# Altium PCB PCB2.PcbDoc
Units mm, origin at the board's own origin, x right, y up, seen from the top; angles counter-clockwise.
Board outline 55 x 70 mm, 2 copper layers (Top Layer, Bottom Layer); 75 components, 53 nets, 231 pads, 14 vias.
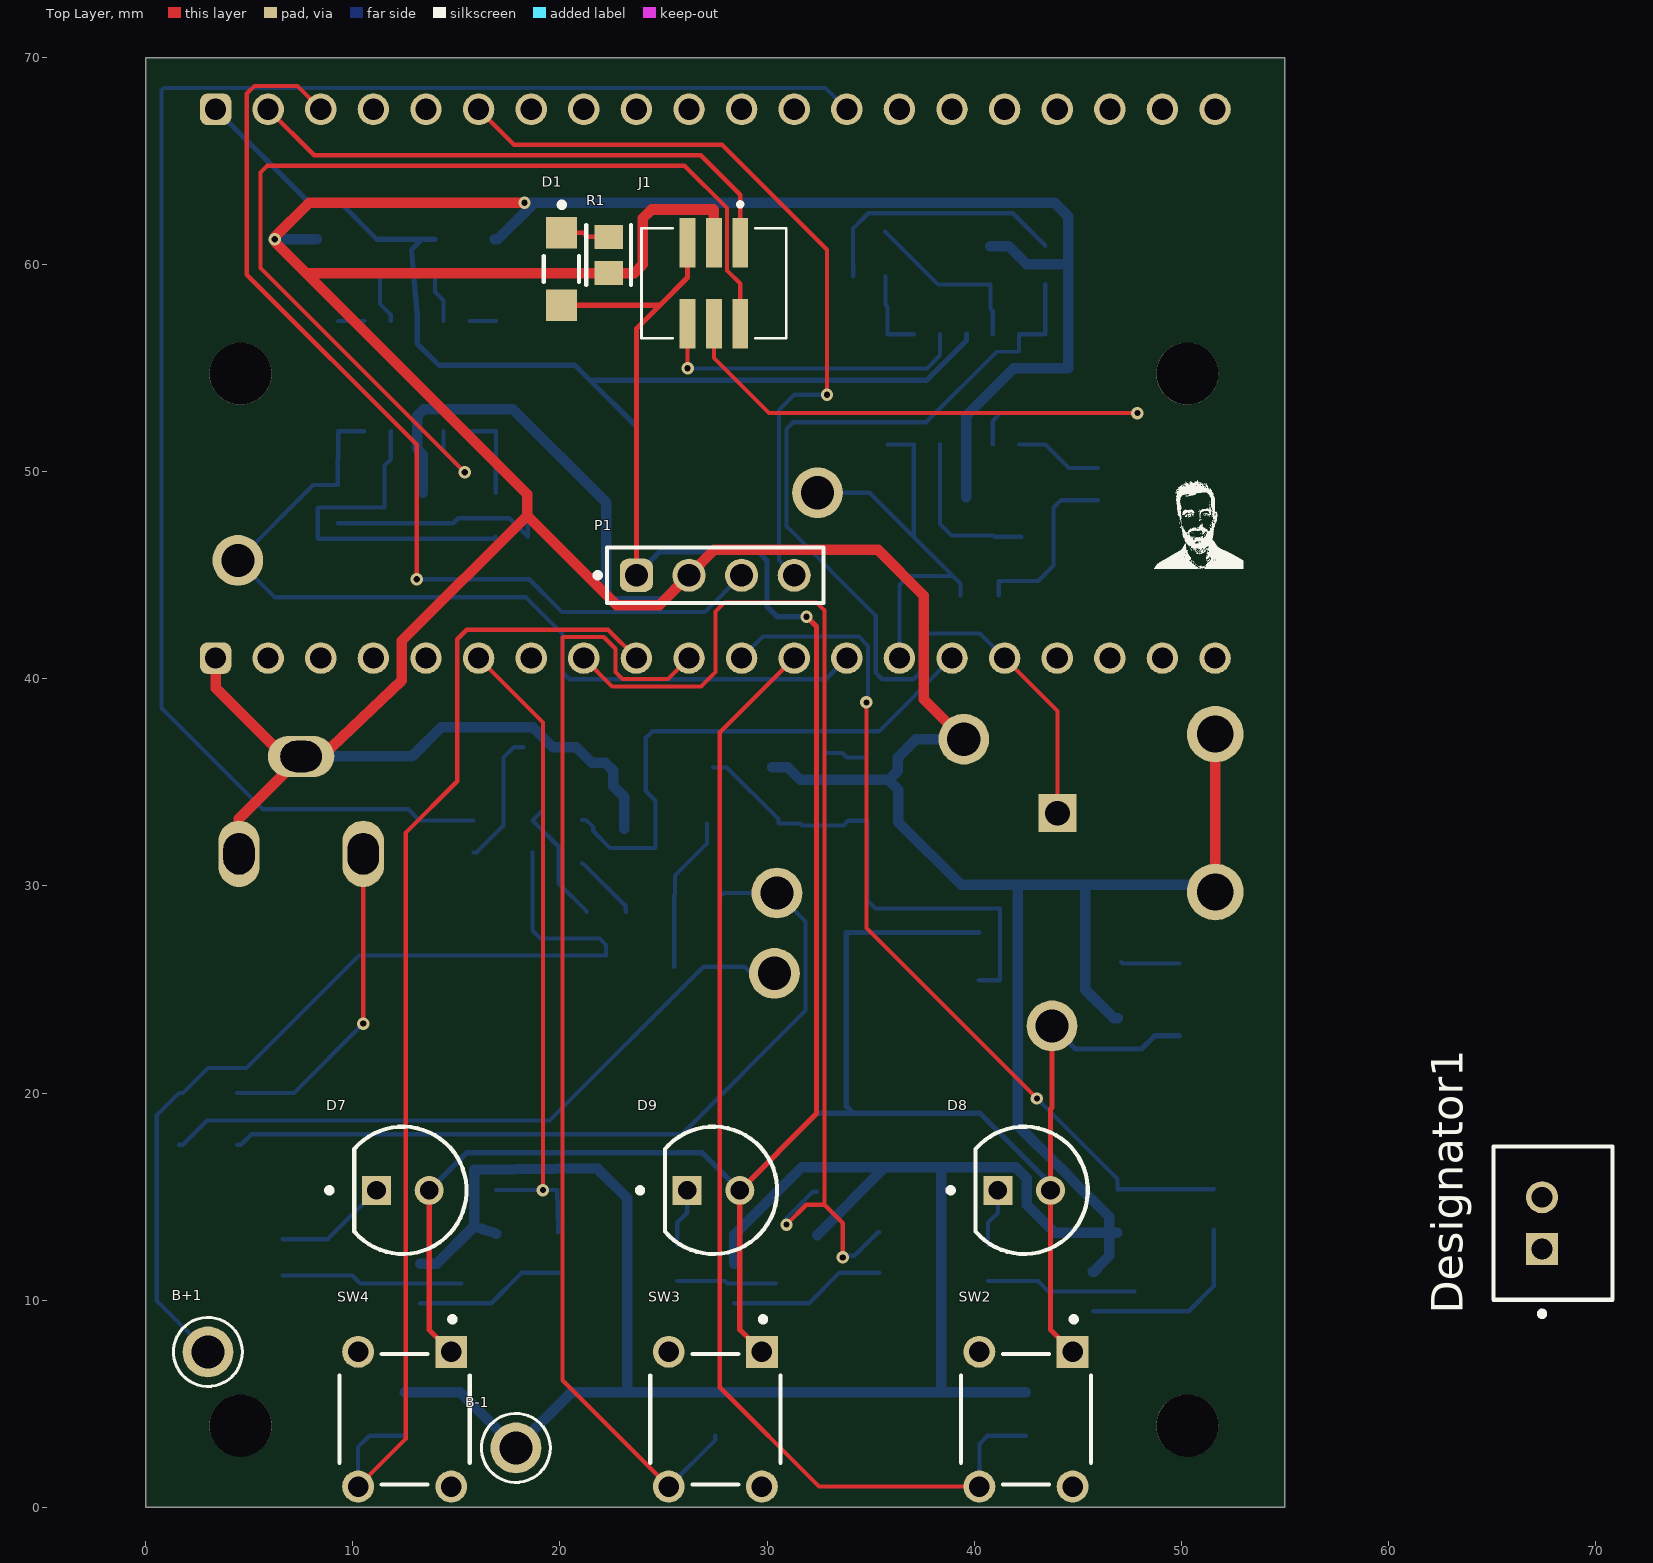
[diagram p0: Top Layer view]
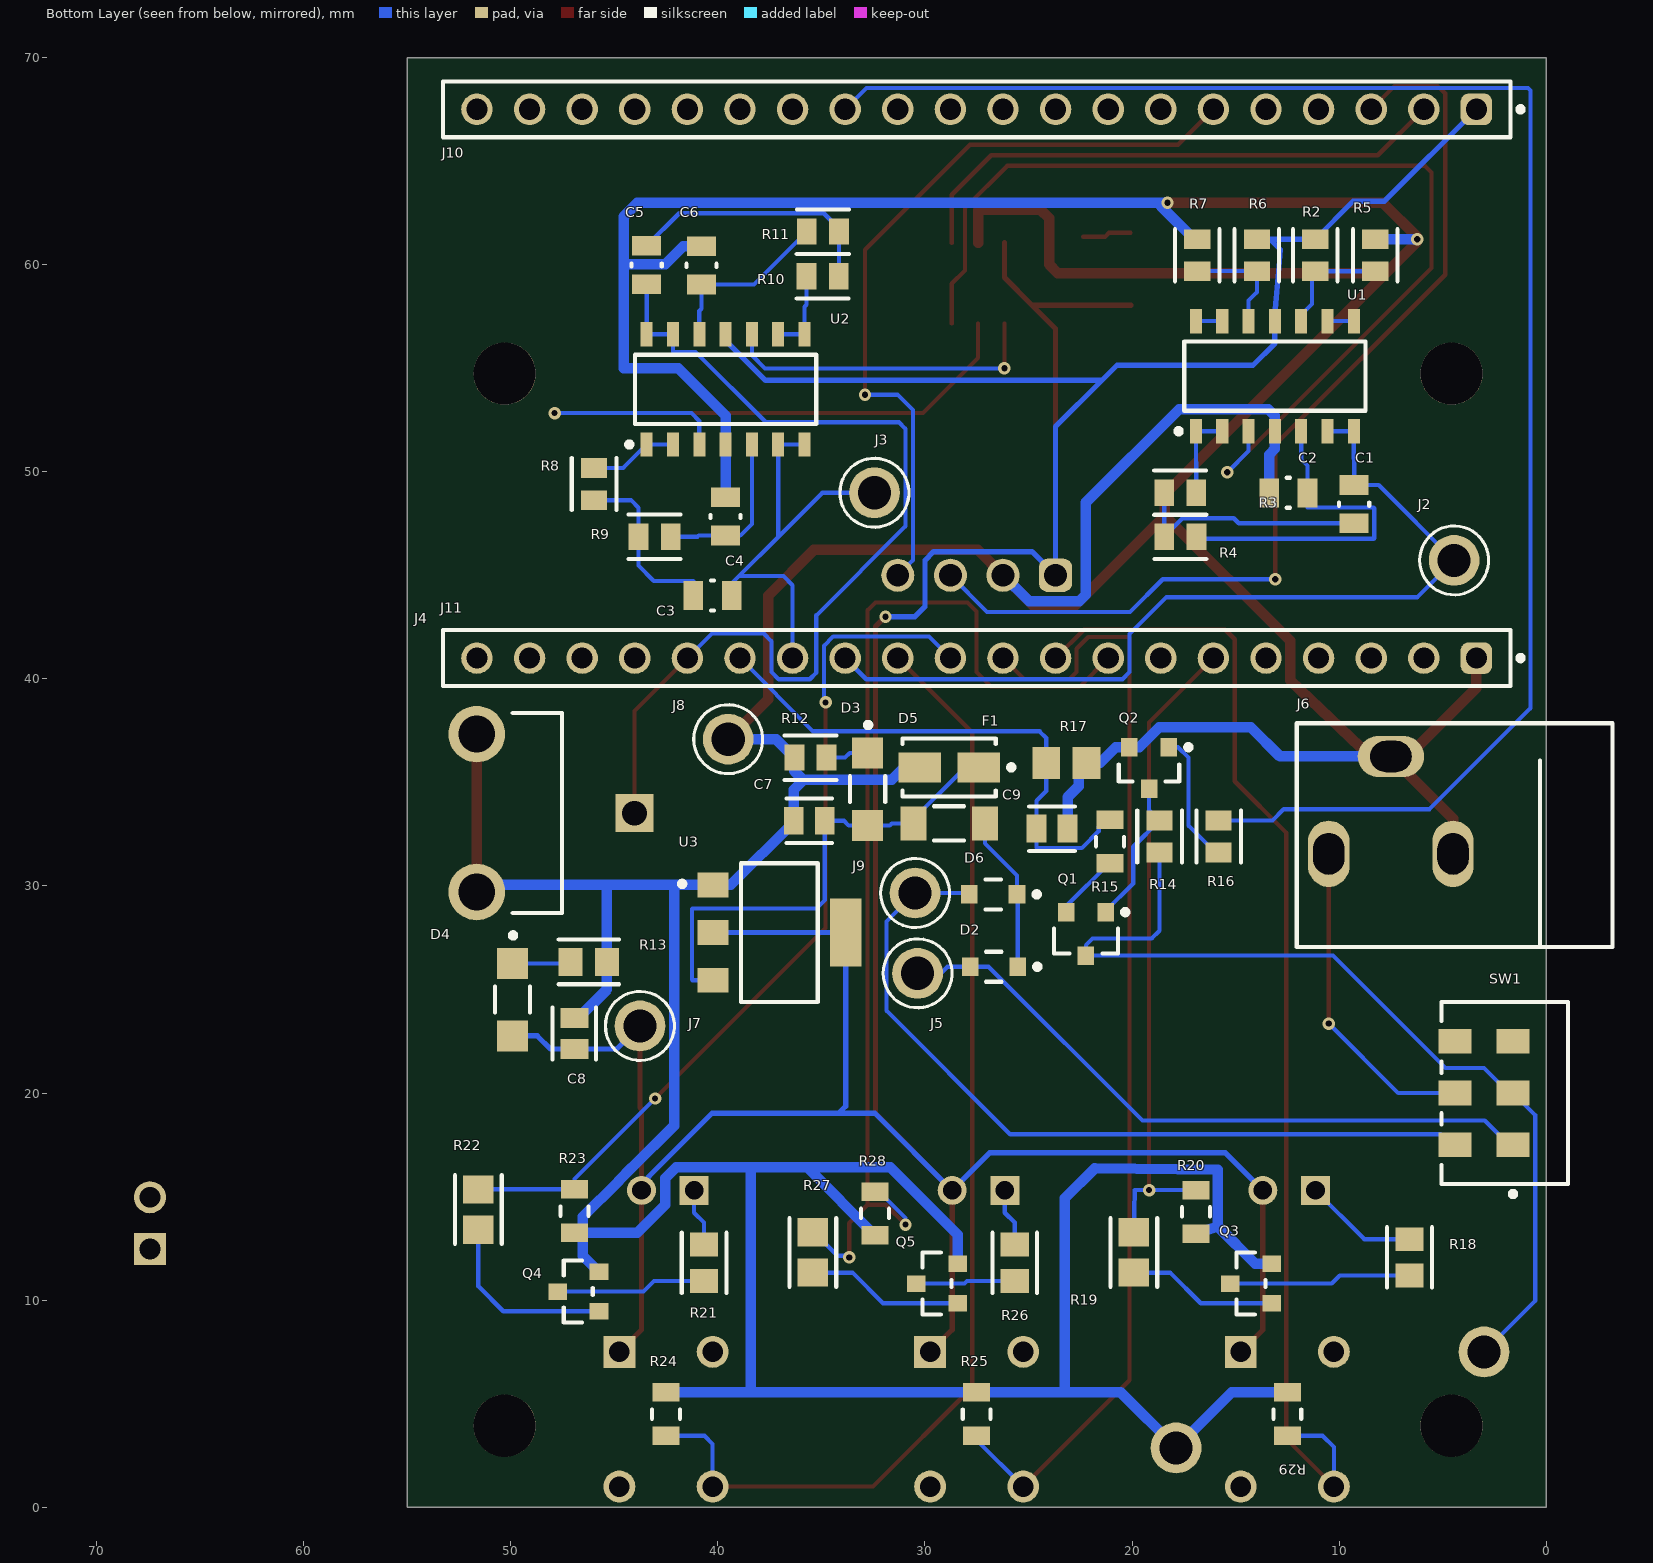
[diagram p1: Bottom Layer view, seen from below]
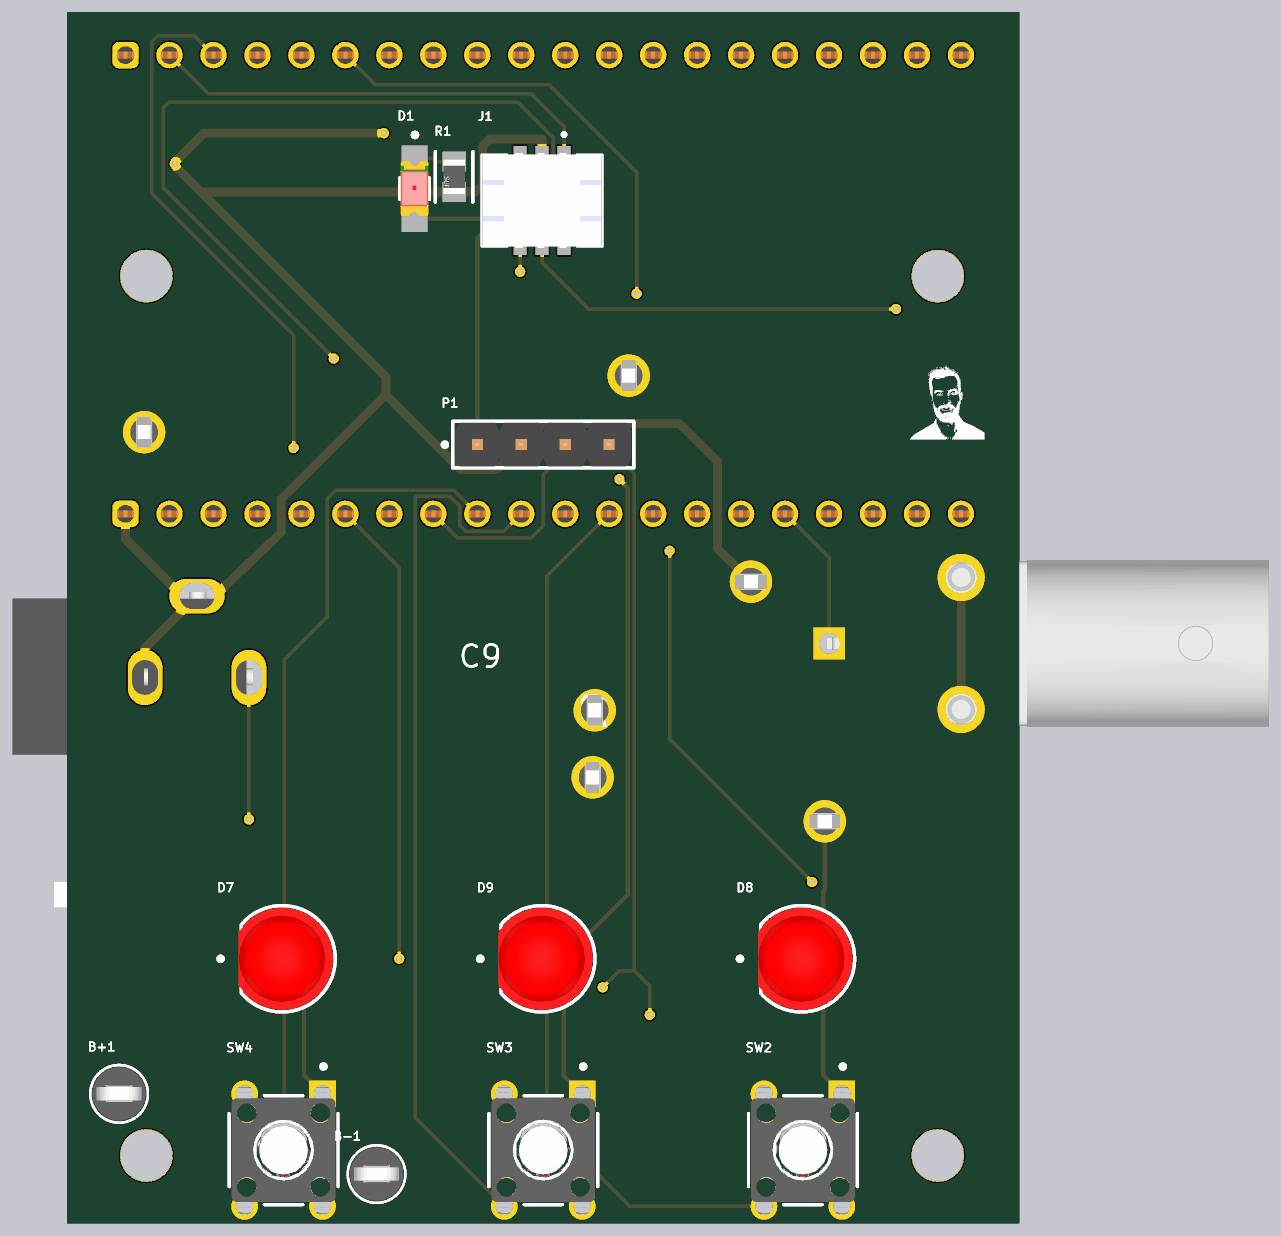
[diagram p2: 3D render of the assembled board from above, using the file's embedded part models]
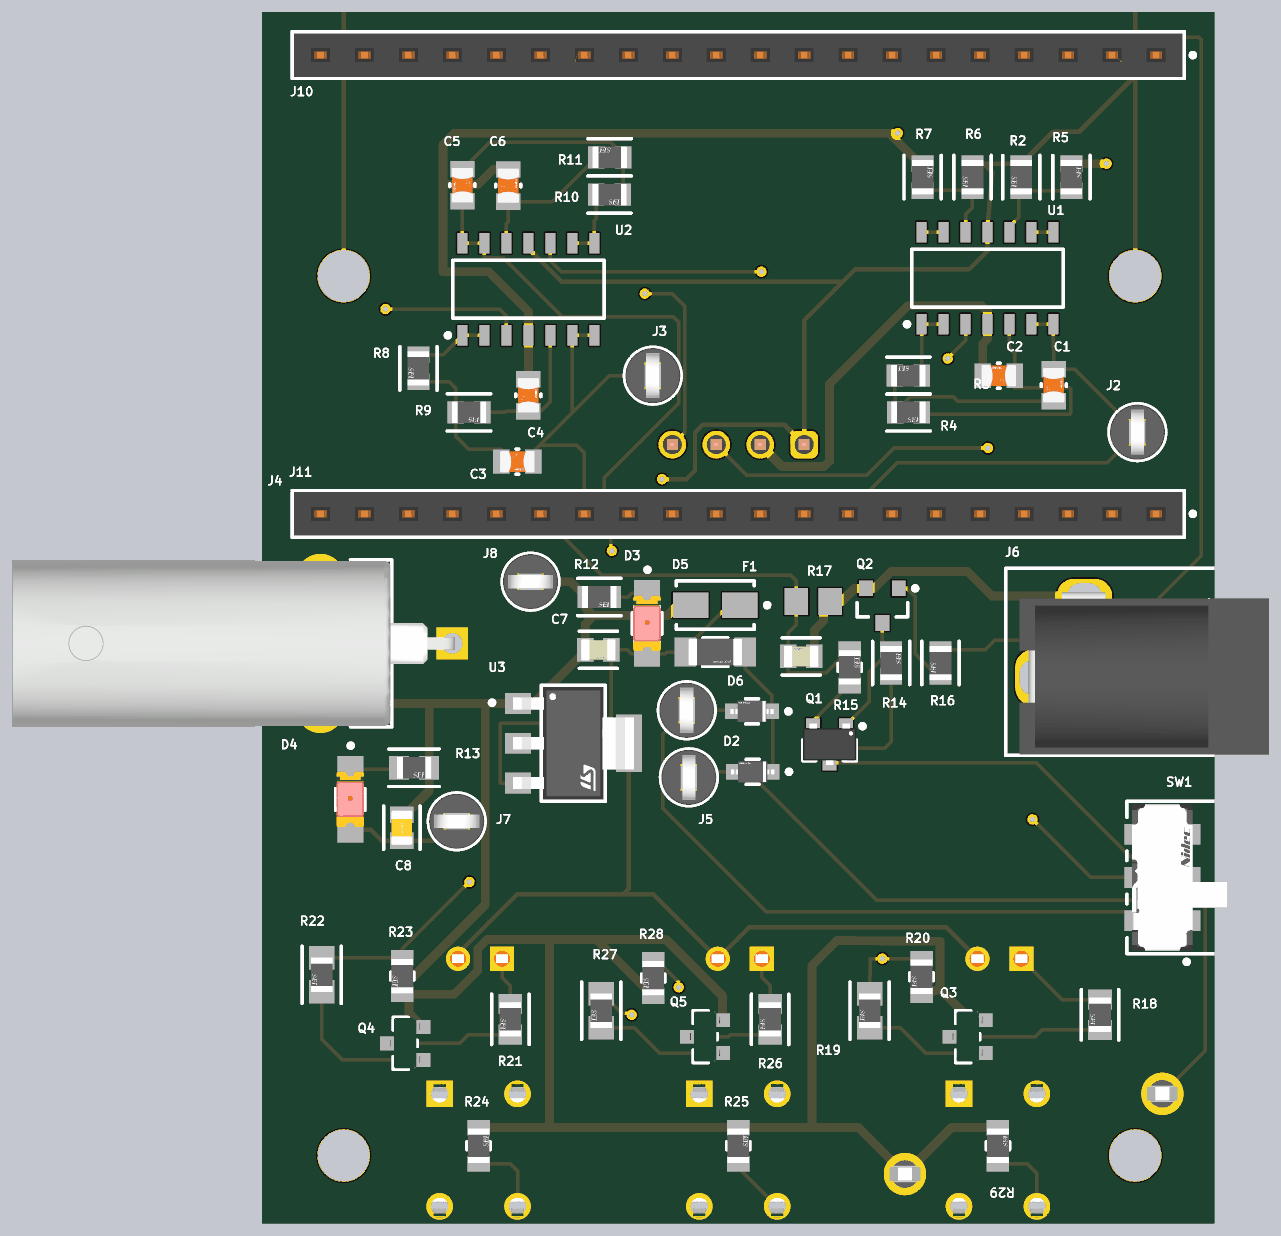
[diagram p3: 3D render of the assembled board from below, using the file's embedded part models]

## Layer stack, top to bottom
Top Solder: solder mask 0.0102, Solder Resist, Dk 3.5
Top Layer: signal copper 0.0356
Dielectric 1: dielectric 0.32, FR-4, Dk 4.8
Bottom Layer: signal copper 0.0356
Bottom Solder: solder mask 0.0102, Solder Resist, Dk 3.5

## Board outline
0,0 55,0 55,70 0,70

## Design rules (kind name [scope] priority, off if disabled: settings)
Clearance "Polygon Clearance" [InPolygon] p1: gap=0.254 ignorepadtopadclearanceinfootprint=TRUE
Clearance [All] p2: gap=0.152 ignorepadtopadclearanceinfootprint=FALSE
HoleSize [All] p1: absolutevalues=TRUE maxlimit=25.4 minlimit=0.2 maxpercent=80.000 minpercent=20.000
MinimumSolderMaskSliver [All] p1: minsoldermaskwidth=0.102
PolygonConnect [All] p1: connectstyle=Relief reliefconductorwidth=0.254 reliefentries=4 polygonreliefangle="90 Angle" airgapwidth=0.254
RoutingCorners [All] p1: cornerstyle=45-Degree minsetback=0.254 maxsetback=0.254
RoutingVias [All] p1: holewidth=0.3 width=0.6 viastyle="Through Hole" minholewidth=0.3 minwidth=0.6 maxholewidth=0.3 maxwidth=0.6
SilkToSolderMaskClearance SilkscreenOverComponentPads [All] p1: minsilkscreentomaskgap=0.1 clearancetoexposedcopper=TRUE
SolderMaskExpansion [All] p1: expansion=0.102 istentingtop=FALSE
SupplyNets "Schematic Supply Nets_1" [InNet('GND')] p1: voltage=0.000
SupplyNets "Schematic Supply Nets" [InNet('+3V3')] p2: voltage=0.000
Width "Width GND" [InNet('GND')] p1: maxlimit=0.508 minlimit=0.508 preferedwidth=0.508
Width "Width Power" [InNet('+3V3') OR InNetClass('PWR')] p2: maxlimit=0.254 minlimit=0.254 preferedwidth=0.254
Width [All] p3: maxlimit=0.203 minlimit=0.152 preferedwidth=0.203
26 further rules are at their usual default settings.

## Classes and differential pairs
component class "Top Level": J10 J11
component class Sheet4: C1 C2 C3 C4 C5 C6 J2 J3 J4 R2 R3 R4 R5 R6 R7 R8 R9 R10 R11 U1 U2
component class Sheet3: D1 J1 R1
component class Sheet2: B+1 B-1 C7 C8 C9 D2 D3 D4 D5 D6 F1 J5 J6 J7 J8 J9 Q1 Q2 R12 R13 R14 R15 R16 R17 SW1 U3
component class r: D7 D8 D9 P1 Q3 Q4 Q5 R18 R19 R20 R21 R22 R23 R24 R25 R26 R27 R28 R29 SW2 SW3 SW4

## Components (designator, comment, footprint, x,y, rotation, side; value= is the part's Value field where it differs from the comment)
B+1 "5006" FP-5006-MFG 3,7.5 r0 top
B-1 "5006" FP-5006-MFG 17.87,2.865 r0 top
C1 "33nF" FP-CC0805-0_85-MFG 9.272,48.434 r90 bottom locked value="33 nF"
C2 "33nF" FP-CC0805-0_85-MFG 12.452,48.984 r0 bottom locked value="33 nF"
C3 "33nF" FP-CC0805-0_85-MFG 40.259,44.018 r180 bottom value="33 nF"
C4 "33nF" FP-CC0805-0_85-MFG 39.624,47.843 r90 bottom value="33 nF"
C5 "33nF" FP-CC0805-0_85-MFG 43.434,59.984 r270 bottom locked value="33 nF"
C6 "33nF" FP-CC0805-0_85-MFG 40.786,59.967 r90 bottom value="33 nF"
C7 "0.1uF" FP-C0805C-DN-MFG 35.582,33.146 r0 bottom value="0.10 μF"
C8 "10uF" FP-C0805C106J8RACAUTO-MFG 46.93,22.872 r90 bottom
C9 "C0805C103J5RAC7210" FP-C0805C-DN-MFG 23.864,32.766 r180 bottom value="10,000 pF"
D1 "LTST-C150KRKT" FP-LTST-C150KRKT-MFG 20.066,59.789 r270 top
D2 "CUS08F30,H3F" FP-USC-MFG 26.67,26.098 r0 bottom
D3 "LTST-C150KRKT" FP-LTST-C150KRKT-MFG 32.766,34.671 r270 bottom
D4 "LTST-C150KRKT" FP-LTST-C150KRKT-MFG 49.911,24.511 r270 bottom
D5 "TVS" VISH-DO-214AC-2_L 28.829,35.724 r0 bottom
D6 "CUS08F30,H3F" FP-USC-MFG 26.704,29.591 r0 bottom
D7 "WP7113SURC" FP-WP7113SURC-MFG 12.413,15.301 r0 top locked
D8 "WP7113SURC" FP-WP7113SURC-MFG 42.413,15.301 r0 top locked
D9 "WP7113SURC" FP-WP7113SURC-MFG 27.413,15.301 r0 top locked
Designator1 "Comment" FP-B2B-XH-A_LF_SN-MFG 67.945,13.716 r90 top
F1 "SF-1206S050-2" FP-SF-1206S-MFG 28.829,33.02 r0 bottom value=596mΩ
J1 "20021221-00006C4LF" AMPHENOL_20021221-00006C4LF 27.432,59.1 r0 top
J2 "5006" FP-5006-MFG 4.445,45.72 r90 bottom
J3 "5006" FP-5006-MFG 32.436,48.984 r90 bottom locked
J4 "5414373-1" FP-5414373-1-MFG 58.5,33.517 r270 bottom
J5 "5006" FP-5006-MFG 30.353,25.781 r270 bottom
J6 "PJ-102AH" "CON Barrel PJ-102AH" 7.5,36.25 r0 bottom locked
J7 "5006" FP-5006-MFG 43.761,23.241 r0 bottom
J8 "5006" FP-5006-MFG 39.497,37.084 r0 bottom
J9 "5006" FP-5006-MFG 30.473,29.655 r270 bottom
J10 "61302011821" 61302011821 27.5,67.5 r0 bottom
J11 "61302011821" 61302011821 27.5,41 r0 bottom locked
P1 "61300411121" 61300411121 27.5,45 r0 top locked
Q1 "SSM3J328R,LF" TOSH-SOT-23F_V 22.225,27.686 r270 bottom
Q2 "MMBT3904LT1G" ONSC-SOT-23-3-318-08_V 19.177,35.698 r270 bottom
Q3 "DMN2004K-7" FP-SOT23-MFG 14.25,10.801 r0 bottom
Q4 "DMN2004K-7" FP-SOT23-MFG 46.736,10.414 r0 bottom
Q5 "DMN2004K-7" FP-SOT23-MFG 29.413,10.801 r0 bottom
R1 "300Ω" FP-RMCF0805-IPC_B 22.352,60.465 r270 top
R2 "100k" FP-RMCF0805-IPC_C 11.149,60.452 r270 bottom
R3 "100k" FP-RMCF0805-IPC_C 17.672,48.984 r0 bottom locked
R4 "100k" FP-RMCF0805-IPC_C 17.667,46.863 r180 bottom locked
R5 "100k" FP-RMCF0805-IPC_C 8.255,60.452 r90 bottom
R6 "100k" FP-RMCF0805-IPC_C 13.97,60.452 r270 bottom
R7 "100k" FP-RMCF0805-IPC_C 16.851,60.452 r90 bottom
R8 "100k" FP-RMCF0805-IPC_C 45.974,49.403 r270 bottom
R9 "100k" FP-RMCF0805-IPC_C 43.053,46.863 r180 bottom
R10 "100k" FP-RMCF0805-IPC_C 34.936,59.442 r180 bottom locked
R11 "100k" FP-RMCF0805-IPC_C 34.925,61.595 r0 bottom locked
R12 "RMCF0805JT3K00" FP-RMCF0805-IPC_C 35.523,36.195 r180 bottom
R13 "RMCF0805JT300R" FP-RMCF0805-IPC_B 46.228,26.333 r180 bottom
R14 "RMCF0805FG100K" FP-RMCF0805-IPC_C 18.669,32.385 r90 bottom
R15 "RMCF0805FT10K0" FP-RMCF0805-MFG 21.061,32.138 r90 bottom
R16 "RMCF0805FT1K00" FP-RMCF0805-IPC_C 15.818,32.385 r270 bottom
R17 "ERJ-6GEYJ563V" RESC2013X70X40ML20T20 23.166,35.941 r0 bottom
R18 "300Ω" FP-RMCF0805-IPC_B 6.604,12.065 r270 bottom
R19 "100Ω" FP-RMCF0805-IPC_A 19.913,12.301 r270 bottom
R20 "10k" FP-RMCF0805-MFG 16.913,14.261 r270 bottom
R21 "300Ω" FP-RMCF0805-IPC_B 40.663,11.801 r270 bottom
R22 "100Ω" FP-RMCF0805-IPC_A 51.562,14.375 r270 bottom
R23 "10k" FP-RMCF0805-MFG 46.913,14.301 r270 bottom
R24 "10k" FP-RMCF0805-MFG 42.5,4.5 r90 bottom
R25 "10k" FP-RMCF0805-MFG 27.5,4.5 r90 bottom
R26 "300Ω" FP-RMCF0805-IPC_B 25.663,11.801 r270 bottom
R27 "100Ω" FP-RMCF0805-IPC_A 35.413,12.301 r270 bottom
R28 "10k" FP-RMCF0805-MFG 32.413,14.188 r270 bottom
R29 "10k" FP-RMCF0805-MFG 12.5,4.5 r90 bottom
SW1 "CL-SB-22A-11T" FP-CL-SB-22A-11T-MFG 2,20 r90 bottom locked
SW2 "2-1825910-7" FP-2-1825910-7-MFG 42.5,4.25 r0 top locked
SW3 "2-1825910-7" FP-2-1825910-7-MFG 27.5,4.25 r0 top locked
SW4 "2-1825910-7" FP-2-1825910-7-MFG 12.5,4.25 r0 top locked
U1 "LM324DR2G" ONSC-SOIC-14-751A-03_V 13.103,54.616 r90 bottom locked
U2 "LM324DR2G" ONSC-SOIC-14-751A-03_V 39.624,53.975 r90 bottom locked
U3 "LD1117S33CTR" FP-SOT-223-0046067_14-MFG 37.023,27.748 r180 bottom

## Footprints (in the part's own frame and the unit in brackets; to place one, negate y for a bottom-side part, rotate by r counter-clockwise, add the part's x,y. Pads: shape width x height; smd on the part's side, far side on the other; paste and mask are expansions set on the pad)
61300411121 [mm] "Pin Header, pitch 2.54 mm, THT, Vertical, single row, 4p"
  rrect50% 1.6x1.6 hole 1.1: 1(-3.81,0)
  round 1.6 hole 1.1: 2(-1.27,0) 3(1.27,0) 4(3.81,0)
  silkscreen extent -5.8,-1.35 5.23,1.34, body extent -5.08,-1.27 5.08,1.27, height 8.57
61302011821 [mm] "Socket Header, Pitch 2.54 mm, THT, Vertical, single row, 20p"
  rrect50% 1.52x1.52 hole 1.02: 1(-24.13,0)
  round 1.52 hole 1.02: 2(-21.59,0) 3(-19.05,0) 4(-16.51,0) 5(-13.97,0) 6(-11.43,0) 7(-8.89,0) 8(-6.35,0) 9(-3.81,0) 10(-1.27,0) 11(1.27,0) 12(3.81,0) 13(6.35,0) 14(8.89,0) 15(11.43,0) 16(13.97,0) 17(16.51,0) 18(19.05,0) 19(21.59,0) 20(24.13,0)
  silkscreen extent -26.38,-1.35 25.78,1.35, body extent -25.65,-1.25 25.65,1.25, height 8.55
AMPHENOL_20021221-00006C4LF [mm]
  rect 0.76x2.4 smd: 1(1.27,1.95) 2(1.27,-1.95) 3(0,1.95) 4(0,-1.95) 5(-1.27,1.95) 6(-1.27,-1.95)
  silkscreen extent -3.49,-2.65 3.49,3.91, body extent -3.4,-2.75 3.4,2.75, height 5.6
"CON Barrel PJ-102AH" [mm] "5.5mm Barrel Plug (2.1mm ID)"
  oval 2x3.2 hole 1.5 slot 2 at 90 deg: 1(3,4.7) 2(-3,4.7)
  oval 3.2x2 hole 1.5 slot 2 at 0 deg: 3(0,0)
  silkscreen extent -10.7,-1.6 4.55,9.2, body extent -10.65,-0.25 3.75,9.15, height 11.01
FP-2-1825910-7-MFG [mm]
  rect 1.54x1.54 hole 0.99 paste-2539.97 mask+0: 1(2.25,3.25)
  round 1.54 hole 0.99 paste-2539.97 mask+0: 2(2.25,-3.25) 3(-2.25,3.25) 4(-2.25,-3.25)
  silkscreen extent -3.14,-3.14 3.15,4.95, body extent -3.24,-4.12 3.24,4.12, height 0.25
FP-5006-MFG [mm]
  round 2.45 hole 1.6 paste-2539.97 mask+0: 1(0,0)
  silkscreen extent -1.66,-1.66 1.67,1.66, body extent -1.77,-1.77 1.77,1.77, height 0.25
FP-5414373-1-MFG [mm]
  rect 1.84x1.84 hole 1.19 paste-2539.97 mask+0: 1(0,14.48)
  round 2.73 hole 1.78 paste-2539.97 mask+0: 2(-3.81,6.86) 3(3.81,6.86)
  silkscreen extent -4.83,8.6 4.83,10.98, body extent -4.83,-10.92 4.83,14.63, height 9.34
FP-B2B-XH-A_LF_SN-MFG [mm]
  rect 1.55x1.55 hole 1 paste-2539.97 mask+0: 1(-1.25,0.525)
  round 1.55 hole 1 paste-2539.97 mask+0: 2(1.25,0.525)
  silkscreen extent -4.5,-2.88 3.7,2.88, body extent -3.8,-2.98 3.8,2.98, height 0.25
FP-C0805C106J8RACAUTO-MFG [mm]
  rect 0.95x1.35 smd paste+0 mask+0: 1(-0.75,0) 2(0.75,0)
  silkscreen extent -1.25,-1.05 1.25,1.05, body extent -1,-0.63 1,0.63, height 1.45
FP-C0805C-DN-MFG [mm]
  rect 0.95x1.35 smd paste+0 mask+0: 1(-0.75,0) 2(0.75,0)
  silkscreen extent -1.1,-1.07 1.1,1.07, body extent -1,-0.63 1,0.63, height 0.88
FP-CC0805-0_85-MFG [mm]
  rect 0.95x1.4 smd paste+0 mask+0: 1(-0.925,0) 2(0.925,0)
  silkscreen extent -0.07,-0.73 0.08,0.72, body extent -1,-0.63 1,0.63, height 0.95
FP-CL-SB-22A-11T-MFG [mm]
  rect 1.2x1.6 smd paste+0 mask+0: 1(-2.5,-0.4) 2(0,-0.4) 3(2.5,-0.4) 4(-2.5,2.4) 5(0,2.4) 6(2.5,2.4)
  silkscreen extent -5,-3.05 4.4,3.05, body extent -4.25,-2.75 4.25,2.75, height 3.8
FP-LTST-C150KRKT-MFG [mm]
  rect 1.5x1.5 smd paste+0 mask+0: 1(-1.75,0) 2(1.75,0)
  silkscreen extent -3.22,-0.85 0.62,0.85, body extent -2.6,-0.95 2.6,0.95, height 0.25
FP-RMCF0805-IPC_A [mm]
  rect 1.355x1.462 smd paste+0 mask+0: 1(-0.976,0) 2(0.976,0)
  silkscreen extent -1.65,-1.13 1.65,1.13, body extent -1,-0.63 1,0.63, height 0.65
FP-RMCF0805-IPC_B [mm]
  rect 1.155x1.362 smd paste+0 mask+0: 1(-0.876,0) 2(0.876,0)
  silkscreen extent -1.45,-1.08 1.45,1.08, body extent -1.7,-0.93 1.7,0.93, height 0.25
FP-RMCF0805-IPC_C [mm]
  rect 0.955x1.262 smd paste+0 mask+0: 1(-0.776,0) 2(0.776,0)
  silkscreen extent -1.25,-1.07 1.25,1.08, body extent -1,-0.63 1,0.63, height 0.65
FP-RMCF0805-MFG [mm]
  rect 0.9x1.3 smd paste+0 mask+0: 1(-1.05,0) 2(1.05,0)
  silkscreen extent -0.23,-0.67 0.22,0.67, body extent -1,-0.63 1,0.63, height 0.65
FP-SF-1206S-MFG [mm]
  rect 1.25x1.65 smd paste+0 mask+0: 1(-1.725,0) 2(1.725,0)
  silkscreen extent -0.73,-0.82 0.73,0.82, body extent -1.55,-0.77 1.55,0.77, height 0.7
FP-SOT23-MFG [mm]
  rect 0.9x0.8 smd paste+0 mask+0: 1(-1,0.95) 2(-1,-0.95) 3(1,0)
  silkscreen extent -0.7,-1.5 0.7,1.5, body extent -1.2,-1.46 1.2,1.44, height 1.1
FP-SOT-223-0046067_14-MFG [mm]
  rect 1.5x1.2 smd paste+0 mask+0: 1(-3.2,2.3) 2(-3.2,0) 3(-3.2,-2.3)
  rect 1.5x3.3 smd paste+0 mask+0: 4(3.2,0)
  silkscreen extent -4.83,-3.35 1.85,3.35, body extent -3.5,-3.25 3.5,3.25, height 1.9
FP-USC-MFG [mm]
  rect 0.8x0.9 smd paste+0 mask+0: 1(-1.15,0) 2(1.15,0)
  silkscreen extent -2.22,-0.73 0.38,0.72, body extent -1.25,-0.63 1.25,0.63, height 1.15
FP-WP7113SURC-MFG [mm]
  rect 1.4x1.4 hole 0.9 paste-2539.97 mask+0: 1(-1.27,0)
  round 1.4 hole 0.9 paste-2539.97 mask+0: 2(1.27,0)
  silkscreen extent -3.67,-3.07 3.07,3.07, body extent -2.5,-2.95 2.94,2.95, height 9.85
ONSC-SOIC-14-751A-03_V [mm] "SOIC, 14-Leads, Body 8.75x4mm, Pitch 1.27mm"
  rect 1.18x0.58 smd: 1(-2.66,3.81) 2(-2.66,2.54) 3(-2.66,1.27) 4(-2.66,0) 5(-2.66,-1.27) 6(-2.66,-2.54) 7(-2.66,-3.81) 8(2.66,-3.81) 9(2.66,-2.54) 10(2.66,-1.27) 11(2.66,0) 12(2.66,1.27) 13(2.66,2.54) 14(2.66,3.81)
  silkscreen extent -2.78,-4.38 1.67,4.78, body extent -2,-4.38 2,4.38, height 1.75
ONSC-SOT-23-3-318-08_V [mm] "SOT23, 3-Leads, Body 2.92x1.3mm, Pitch 0.95mm"
  rect 0.9x0.8 smd: 1(-1,0.95) 2(-1,-0.95) 3(1,0)
  silkscreen extent -1.12,-1.46 0.65,2.02, body extent -0.65,-1.46 0.65,1.46, height 1.11
RESC2013X70X40ML20T20 [mm] "Chip Resistor, 2-Leads, Body 2.00x1.25mm, IPC Low Density"
  rect 1.35x1.55 smd: 1(-0.975,0) 2(0.975,0)
  body extent -1.1,-0.72 1.1,0.72, height 0.7
TOSH-SOT-23F_V [mm] "SOTFL, 3-Leads, Body 3.1x1.9mm, Pitch 0.95mm"
  rect 0.9x0.8 smd: 1(-1.05,0.95) 2(-1.05,-0.95) 3(1.05,0)
  silkscreen extent -1.17,-1.55 0.95,2.02, body extent -1.2,-1.55 1.2,1.55, height 0.88
VISH-DO-214AC-2_L [mm] "DO-214AC, 2-Leads, Body 4.5x2.79mm, IPC High Density"
  rect 2.05x1.45 smd: 1(-1.425,0) 2(1.425,0)
  silkscreen extent -3.12,-1.4 2.25,1.4, body extent -2.25,-1.4 2.25,1.4, height 2.29

## Part data
B+1 B-1 J2 J3 J5 J7 J8 J9: library part CMP-19636-000022-1, "PC TEST POINT COMPACT BLACK", Color=Black, Flammability Rating="UL94 V-0", Package Quantity=100, Body Material=Bronze, Contact Material=Bronze, Contact Plating=Tin, Height=0.35inch, Hole Diameter=1.6mm, Housing Color=Black, Inside Diameter=1.78mm, Insulation Material=Nylon, Lead Free="Lead Free", Length=8.89mm, Material=Nylon, Mount=PCB, Number of Ports=1, Orientation=Straight, Outside Diameter=3.18mm, Packaging=Bulk, Plating=Silver, REACH SVHC="No SVHC", RoHS Compliant=Yes, Series=THM
C1 C2 C3 C4 C5 C6: library part CMP-03422-000099-1, "CAP CER 0.033UF 50V X7R 0805, CC0805KRX7R9BB333", Capacitance="33 nF", Manufacturer=Yageo, Manufacturer Part Number=CC0805KRX7R9BB333, Package=CC0805-0.85, Temperature="-30°C to +85°C", Temperature Characteristic=X7R, Temperature Range High=+85°C, Temperature Range Low=-30°C, Tolerance=0.1, Voltage Rating="50 V", Automotive=No, Category=Cap, ComponentLink2Description=Datasheet, ComponentLink2URL=http://www.yageo.com/documents/recent/UPY-GPHC_Y5V_6.3V-to-50V_8.pdf, Device Class L1="Passive Components", Device Class L2=Capacitors, Device Class L3="Ceramic Capacitors", Digikey Description="CAP CER 0.033UF 50V X7R 0805", Footprint Url=http://www.yageo.com/exep/pages/download/literatures/UPY-C_GEN_24.pdf, Height=0.95mm, Ipc Land Pattern Name=CAPC200125X85, Lead Free=Yes, Material=Ceramic, Mouser Description="Multilayer Ceramic Capacitors MLCC - SMD/SMT 33nF 50V X7R 10%", Octopart=https://octopart.com/cc0805krx7r9bb333-yageo-42333931, RoHS=TRUE
C7: library part CMP-03020-000950-1, "CAP CER 0.1UF 50V X7R 0805", Capacitance="0.10 μF", Manufacturer=KEMET, Manufacturer Part Number=C0805C104J5RACTU, Package=C0805C-DN, Temperature="-55°C to +125°C", Temperature Characteristic=X7R, Temperature Coefficient=30ppm/°C, Temperature Range High=+125°C, Temperature Range Low=-55°C, Tolerance=0.05, Voltage Rating="50 V", Automotive=No, Category=Cap, ComponentLink2Description=Datasheet, ComponentLink2URL=https://content.kemet.com/datasheets/KEM_C1003_C0G_SMD.pdf, Device Class L1="Passive Components", Device Class L2=Capacitors, Device Class L3="Ceramic Capacitors", Digikey Description="CAP CER 0.1UF 50V X7R 0805", Height=0.88mm, Ipc Land Pattern Name=CAPC200125X78, Lead Free=Yes, Material=Ceramic, Mouser Description="Multilayer Ceramic Capacitors MLCC - SMD/SMT 50volts 0.1uF X7R 5%", Octopart=https://octopart.com/c0805c104j5ractu-kemet-104634, RoHS=TRUE
C8: library part CMP-03020-034708-1, "CAP CER 10UF 10V X7R 0805", Case Code (Imperial)=0805, Case Code (Metric)=2012, Max Operating Temperature=125°C, Min Operating Temperature=-55°C, Ratings=AEC-Q200, Tolerance=5%, Voltage Rating=10V, Capacitance=10uF, Case/Package=0805, Mount="Surface Mount", Packaging="Tape and Reel", RoHS Compliant=Yes
C9: library part CMP-2007-01173-3, "CAP CER SMD 0805 .01UF X7R 5% 50", Capacitance="10,000 pF", Manufacturer=KEMET, Package=C0805C-DN, Temperature="-55°C to +125°C", Temperature Characteristic=X7R, Temperature Coefficient=30ppm/°C, Temperature Range High=+125°C, Temperature Range Low=-55°C, Tolerance=0.05, Voltage Rating="50 V", Automotive=No, Category=Cap, ComponentLink2Description=Datasheet, ComponentLink2URL=https://content.kemet.com/datasheets/KEM_C1003_C0G_SMD.pdf, Device Class L1="Passive Components", Device Class L2=Capacitors, Device Class L3="Ceramic Capacitors", Digikey Description="CAP CER SMD 0805 .01UF X7R 5% 50", Height=0.88mm, Ipc Land Pattern Name=CAPC200125X78, Lead Free=Yes, Manufacturer Part Number=C0805C103J5RAC7210, Material=Ceramic, Mouser Description="Cap Ceramic 0.01uF 50V X7R 5% Pad SMD 0805 125C T/R", Octopart=https://octopart.com/c0805c103j5rac7210-kemet-3921106, RoHS=TRUE
D1 D3 D4: library part CMP-2000-06617-2, "LED RED CLEAR 1206 SMD", Case Code (Imperial)=1206, Case Code (Metric)=3216, Color=Red, Forward Current=30mA, Forward Voltage=2V, Lens Color=Colorless, Max Operating Temperature=85°C, Min Operating Temperature=-30°C, Package Quantity=1, Power Dissipation=62.5mW, Power Rating=75mW, Reverse Voltage=5V, Test Current=20mA, Case/Package=1206, Depth=1.6mm, Dominant Wavelength=631nm, Height=1.1mm, Illumination Color=Red, Lead Free="Lead Free", Length=3.2mm, Lens Style=Diffused, Lens Transparency=Clear, Luminous Intensity=54mcd, Mount="Surface Mount", Number of Elements=1, Number of LEDs=1, Number of Pins=2, Packaging="Tape and Reel", Radiation Hardening=No, Viewing Angle=130°, Wavelength=639nm, Width=1.6mm
D2 D6: library part CMP-00375-53632863-1, "CUS08F30,H3F Rectifier Diode, Schottky, 1 Phase, 1 Element, 0.8A, 30V V(RRM), Silicon", Average Rectified Current=800mA, Capacitance=170pF, Case/Package=SOD, Max Forward Surge Current (Ifsm)=5A, Max Junction Temperature (Tj)=125°C, Max Repetitive Reverse Voltage (Vrrm)=30V, Min Operating Temperature=-55°C, Peak Reverse Current=50µA, Contact Plating="Silver, Tin", Element Configuration=Single, Forward Current=800mA, Height=1.15mm, Max Operating Temperature=125°C, Max Reverse Voltage (DC)=30V, Mount="Surface Mount", NexarPartId=53632863, Number of Pins=2, Packaging=Digi-Reel®, Peak Non-Repetitive Surge Current=5A, Reverse Voltage=30V, RoHS=Compliant, Schedule B="8541100080, 8541100080"
D5: library part CMP-0548-00238-2, "Transient Voltage Suppressor, 6.40 to 231 V, 10 V Stand-off Voltage, Uni-Directional, -55 to 155 degC, 2-pin DO-214AC, Pb-Free, Tape and Reel", Manufacturer="Vishay Semiconductor", Operating Junction and Storage Temperature Range="-55 to 150 degC", PartNumber=SMAJ10A-E3/61, ComponentLink1Description="Manufacturer URL", ComponentLink1URL=http://www.vishay.com/, ComponentLink2Description=Datasheet, ComponentLink2URL=http://www.vishay.com/docs/88390/smaj50a.pdf, ComponentLink3Description="Package Specification", ComponentLink3URL=http://www.vishay.com/docs/88390/smaj50a.pdf, DatasheetVersion=12/8/2013, ID (uA)=1, IFSM="40 A", Mounting Technology="Surface Mount", PackageDescription="2-Pin DO-214AC (SMA), Body 4.245 x 2.665 mm", PackageReference=DO-214AC-2, Packing="Tape and Reel", PPPM (W)="400, 300", RoHS=TRUE, VBR Uni-Directional (V)="6.4 to 231", VWM (V)=10
D7 D8 D9: library part CMP-00682-00869413-1, "WP7113SURC Red 5 mm 20 º Water Clear 3800 mcd 1.9 V Solid State LED Lamp - T-1 3/4", Case/Package=Radial, Color=Red, Forward Current=20mA, Forward Voltage=1.9V, Max Junction Temperature (Tj)=115°C, Max Operating Temperature=85°C, Min Operating Temperature=-40°C, Power Dissipation=75mW, Reverse Voltage=5V, Dominant Wavelength=630nm, Height=8.6mm, Illumination Color=Red, Lead Free="Lead Free", Lens Style="Clear, Dome", Luminous Intensity=1.4cd, Mount="Through Hole", NexarPartId=869413, Packaging=Bulk, RoHS=Compliant, Test Current=20mA, Viewing Angle=20°, Wavelength=628nm
F1: library part CMP-07399-000002-1, "FUSE BOARD MNT 500MA 63VDC 1206", Fuse Current=0.5A, Fuse Interrupt Dc Current=50A, Manufacturer=Bourns, Max Fuse Dc Voltage=63V, Package=SF-1206S, Resistance=596mΩ, Temperature="-20°C to +105°C", Temperature Range High=+105°C, Temperature Range Low=-20°C, Automotive=No, Category=Fuse, ComponentLink2Description=Datasheet, ComponentLink2URL=https://www.bourns.com/docs/product-datasheets/sf-1206s.pdf?sfvrsn=e6b376e3_33, Device Class L1="Circuit Protection", Device Class L2=Fuses, Device Class L3=unset, Digikey Description="FUSE BOARD MNT 500MA 63VDC 1206", Fuse Blow Speed=Slow, Fuse I2T=0.03A2Sec, Height=0.7mm, Ipc Land Pattern Name=CAPC310155X60, Lead Free=Yes, Manufacturer Part Number=SF-1206S050-2, Mouser Description="Fuse Chip Slow Blow Acting 0.5A 63V SMD Solder Pad 1206 T/R UL", Octopart=https://octopart.com/sf-1206s050-2-bourns-8398336, RoHS=TRUE, Voltage Rating=63V
J1: Package=None, Availability=Unavailable, MF="Amphenol ICC", MP=20021221-00006C4LF, Price=None
J4: library part CMP-03357-000008-1, "CONN BNC JACK R/A 50 OHM PCB", Dielectric Material=Polymethylpentene, Frequency=4GHz, Housing Color=Silver, Insulation Resistance=5GR, Max Operating Temperature=85°C, Min Operating Temperature=-55°C, Operating Frequency="0 to 4 GHz", Package Quantity=50, Voltage Rating=500V, Body Material=Zinc, Body Plating=Nickel, Center Contact Plating=Gold, Connector Type=BNC, Contact Material=Bronze, Contact Plating=Gold, Fastening Type=Bayonet, Gender=Female, Impedance=50R, Insulation Material=Polymethylpentene, Length=25.4mm, Mating Cycles=500, Max Frequency=4GHz, Mount="Through Hole", Number of Ports=1, Number of Positions=1, Orientation="Right Angle", Packaging=Tray, PCB Mount Retention=Without, PCB Mounting Orientation="Right Angle", Polarity=Standard, Radiation Hardening=No, Sealable="No (Without)", Series=-, Termination="Through Hole", Wire/Cable Type=Coaxial
J6: library part "CON PWR PJ-102AH", "Power Barrel Con, 2.0mm ID, 5.5mm OD, 5A", Manufacturer="CUI Devices", Digikey Order=CP-102AH-ND, Manufacturer Code=PJ-102AH, Supplier 1="Arrow Electronics", Supplier Part Number 1=PJ-102AH
J10 J11: library part CMP-1502-01348-3, Contact Resistance=20mΩ, Current Rating=3A, Operating Supply Voltage=250V, Gender=Female, Lead Pitch=2.54mm, NexarPartId=61924744, Number of Pins=20, Orientation=Vertical, RoHS=Non-Compliant
P1: library part CMP-1502-01064-3, Color=Black, Contact Resistance=20mΩ, Current Rating=3A, Max Operating Temperature=105°C, Min Operating Temperature=-40°C, Operating Supply Voltage=250V, Connector Type="Male Pin", Contact Material=Copper, Contact Mating Length=5.9944mm, Contact Plating=Gold, Gender=Male, Height=8.89mm, Lead Free="Lead Free", Lead Pitch=2.54mm, Mount="Through Hole", NexarPartId=32855522, Number Of Contacts=4, Number of Pins=4, Number of Positions=4, Number of Rows=1, Orientation=Vertical, Packaging=Bulk, Pitch=2.54mm, REACH SVHC=Unknown, RoHS=Compliant, Termination=Solder, Voltage Rating=250V
Q1: library part CMP-2100-03686-1, "TOSHIBA Field-Effect Transistor Silicon P-Channel MOS Type (U-MOS VI), 20 V, -55 to 125 degC, 3-Pin SOTFL, RoHS, Tape and Reel", Case/Package=SOT-23-3, Continuous Drain Current (ID)=6A, Drain To Source Breakdown Voltage=-20V, Drain To Source Resistance=47.4mOhm, Drain to Source Voltage (Vdss)=20V, Gate to Source Voltage (Vgs)=8V, Input Capacitance=840pF, Manufacturer=Toshiba, Max Operating Temperature=150degC, Max Power Dissipation=1W, Min Operating Temperature=-55degC, Package Description="3-Pin Small Outline Transistor, Flat Lead, Body 2.9 x 1.8 mm, Pitch 0.95 mm", Package Quantity=3000, Package Reference=SOT-23F, Power Dissipation=2W, Datasheet URL=https://toshiba.semicon-storage.com/info/docget.jsp?did=2429&prodName=SSM3J328R, Datasheet Version=41699.0, Element Configuration=Single, Manufacturer URL=http://www.toshiba.com/, Mount=SurfaceMount, Number Of Channels=1, Number of Elements=1, Number of Pins=3, Package URL=https://toshiba.semicon-storage.com/ap-en/design-support/package/detail.SOT-23F.html, Packaging=TapeandReel, Radiation Hardening=No, Rds On Max=29.8mOhm, RoHSCompliant=true, Turn-Off Delay Time=107ns, Turn-On Delay Time=32ns
Q2: library part CMP-1048-00631-1, "General Purpose Transistor, NPN Silicon, 3-Pin SOT-23, Pb-Free, Tape and Reel", Manufacturer="On Semiconductor", ComponentLink1Description="Manufacturer URL", ComponentLink1URL=http://www.onsemi.com/, ComponentLink2Description=Datasheet, ComponentLink2URL=http://www.onsemi.cn/pub_link/Collateral/MMBT3904LT1-D.PDF, ComponentLink3Description="Package Specification", ComponentLink3URL=http://www.onsemi.cn/pub_link/Collateral/318-08.PDF, DatasheetVersion="Rev. 12", fT Min (MHz)=300, IC Continuous (A)=0.2, Mounting Technology="Surface Mount", PackageDescription="3-Pin Small Outline Transistor, Body 2.92 x 1.3 mm, Pitch 0.95 mm", PackageReference=SOT-23-3-318-08, PackageVersion="Rev. AP, 11/2009", Packing="Tape and Reel", PartNumber=MMBT3904LT1G, Polarity=NPN, RoHS=TRUE
Q3 Q4 Q5: library part CMP-12801-000057-1, "MOSFET N-CH 20V 0.63A SOT23-3", Continuous Drain Current=630mA, Drain To Source Breakdown Voltage=20V, Drain To Source Resistance=0.4Ω, Gate To Source Voltage=8V, Input Capacitace At Vds="150pF @ 16V", Manufacturer="Diodes Inc.", Max Forward Diode Voltage=1V, Max Junction Temp=+150°C, Package=SOT23, Power Dissipation=350mW, Pulse Drain Current=1.5A, Temperature="-65°C to +150°C", Temperature Range Low=-65°C, Automotive=Yes, Automotive Grade="Grade 0", Category=Trans, ComponentLink2Description=Datasheet, ComponentLink2URL=https://www.diodes.com/assets/Datasheets/ds30938.pdf, Depletion Mode=False, Device Class L1="Discrete Semiconductors", Device Class L2=Transistors, Device Class L3=MOSFETs, Digikey Description="MOSFET N-CH 20V 0.63A SOT23-3", Drain To Source Voltage=20V, Footprint Url=https://www.diodes.com/assets/Package-Files/SOT23.pdf, Gate Charge At Vgs="0.9nC @ 4.5V", Height=1.1mm, Lead Free=Yes, Manufacturer Part Number=DMN2004K-7, Mouser Description="MOSFET 20V 540mA", Number Of Channels=1, Number Of N Channels=1, Octopart=https://octopart.com/dmn2004k-7-diodes+inc.-7127688, Reverse Recovery Charge=0.85nC, Reverse Recovery Time=5.5ns, RoHS=TRUE, Rthja Max=357°C/W, Standoff Height=0.013mm, Temperature Range High=+150°C, Threshold Vgs Max=1V, Threshold Vgs Min=0.5V, Turn Off Delay Time=59.4ns, Turn On Delay Time=5.7ns
R1 R18 R21 R26: library part CMP-26527-003681-1, "300Ω ±5% 0.125W 0805 Thick Film Chip Resistor AEC-Q200 compliant, RMCF0805JT300R", Case Code (Imperial)=0805, Case Code (Metric)=2012, Max Operating Temperature=155°C, Max Power Dissipation=125mW, Min Operating Temperature=-55°C, Package Quantity=5000, Resistance=300R, Resistor Type="Thick Film", Temperature Coefficient=200ppm/°C, Tolerance=5%, Case/Package=0805, Contact Plating=Tin, Features="Automotive AEC-Q200", Height=0.026inch, Length=0.079inch, Mount="Surface Mount", Number of Terminations=2, Packaging="Tape and Reel", Radiation Hardening=No, RoHS Compliant=Yes, Series=RMCF, Width=0.049inch
R2 R3 R4 R5 R6 R7 R8 R9 R10 R11: library part CMP-26527-003818-1, "100kΩ ±1% 0.125W 0805 Thick Film Chip Resistor AEC-Q200 compliant, RMCF0805FG100K", Case Code (Imperial)=0805, Case Code (Metric)=2012, Max Operating Temperature=155°C, Max Power Dissipation=125mW, Min Operating Temperature=-55°C, Package Quantity=10000, Resistance=100kR, Resistor Type="Thick Film", Temperature Coefficient=100ppm/°C, Tolerance=1%, Case/Package=0805, Construction=Rectangular, Contact Plating=Tin, Depth=1.25mm, Features="Automotive AEC-Q200", Height=0.026inch, Length=0.079inch, Military Standard=Not, Mount="Surface Mount", Number of Terminations=2, Packaging="Tape and Reel", Radiation Hardening=No, RoHS Compliant=Yes, Series=RMCF, Width=0.049inch
R12: library part CMP-26527-006913-1, "3kΩ ±5% 0.125W 0805 Thick Film Chip Resistor AEC-Q200 compliant", Case Code (Imperial)=0805, Case Code (Metric)=2012, Max Operating Temperature=155°C, Max Power Dissipation=125mW, Min Operating Temperature=-55°C, Resistance=3kR, Resistor Type="Thick Film", Temperature Coefficient=200ppm/°C, Tolerance=5%, Case/Package=0805, Construction=Rectangular, Contact Plating=Tin, Depth=1.25mm, Features="Automotive AEC-Q200", Height=0.026inch, Length=0.079inch, Military Standard=Not, Mount="Surface Mount", Number of Terminations=2, Packaging="Tape and Reel", Radiation Hardening=No, RoHS Compliant=Yes, Series=RMCF, Width=0.049inch
R13: library part CMP-26527-003681-1, "300Ω ±5% 0.125W 0805 Thick Film Chip Resistor AEC-Q200 compliant", Case Code (Imperial)=0805, Case Code (Metric)=2012, Max Operating Temperature=155°C, Max Power Dissipation=125mW, Min Operating Temperature=-55°C, Package Quantity=5000, Resistance=300R, Resistor Type="Thick Film", Temperature Coefficient=200ppm/°C, Tolerance=5%, Case/Package=0805, Contact Plating=Tin, Features="Automotive AEC-Q200", Height=0.026inch, Length=0.079inch, Mount="Surface Mount", Number of Terminations=2, Packaging="Tape and Reel", Radiation Hardening=No, RoHS Compliant=Yes, Series=RMCF, Width=0.049inch
R14: library part CMP-26527-003818-1, "100kΩ ±1% 0.125W 0805 Thick Film Chip Resistor AEC-Q200 compliant", Case Code (Imperial)=0805, Case Code (Metric)=2012, Max Operating Temperature=155°C, Max Power Dissipation=125mW, Min Operating Temperature=-55°C, Package Quantity=10000, Resistance=100kR, Resistor Type="Thick Film", Temperature Coefficient=100ppm/°C, Tolerance=1%, Case/Package=0805, Construction=Rectangular, Contact Plating=Tin, Depth=1.25mm, Features="Automotive AEC-Q200", Height=0.026inch, Length=0.079inch, Military Standard=Not, Mount="Surface Mount", Number of Terminations=2, Packaging="Tape and Reel", Radiation Hardening=No, RoHS Compliant=Yes, Series=RMCF, Width=0.049inch
R15: library part CMP-26527-000121-1, "RES 10K OHM 1% 1/8W 0805", Case Code (Imperial)=0805, Case Code (Metric)=2012, Max Operating Temperature=155°C, Max Power Dissipation=125mW, Min Operating Temperature=-55°C, Resistance=10kR, Resistor Type="Thick Film", Temperature Coefficient=100ppm/°C, Tolerance=1%, Case/Package=0805, Construction=Rectangular, Contact Plating=Tin, Depth=1.25mm, Features="Automotive AEC-Q200", Height=0.026inch, Lead Free="Lead Free", Length=2mm, Military Standard=Not, Mount="Surface Mount", Number of Terminations=2, Packaging="Tape and Reel", Power Rating=125mW, Radiation Hardening=No, RoHS Compliant=Yes, Series=RMCF, Size Code=0805, Width=0.049inch
R16: library part CMP-26527-002331-1, "1kΩ ±1% 0.125W 0805 Thick Film Chip Resistor AEC-Q200 compliant", Case Code (Imperial)=0805, Case Code (Metric)=2012, Max Operating Temperature=155°C, Max Power Dissipation=125mW, Min Operating Temperature=-55°C, Resistance=1kR, Resistor Type="Thick Film", Temperature Coefficient=100ppm/°C, Tolerance=1%, Case/Package=0805, Construction=Rectangular, Contact Plating=Tin, Depth=1.25mm, Features="Automotive AEC-Q200", Height=0.026inch, Lead Free="Lead Free", Length=2mm, Military Standard=Not, Mount="Surface Mount", Number of Terminations=2, Packaging="Tape and Reel", Power Rating=125mW, Radiation Hardening=No, RoHS Compliant=Yes, Series=RMCF, Size Code=0805, Width=0.049inch
R17: library part CMP-2001-00434-1, Manufacturer=Panasonic, Part Number=ERJ-6GEYJ563V
R19 R22 R27: library part CMP-26527-001731-1, "100Ω ±1% 0.125W 0805 Thick Film Chip Resistor AEC-Q200 compliant, RMCF0805FT100R", Case Code (Imperial)=0805, Case Code (Metric)=2012, Max Operating Temperature=155°C, Max Power Dissipation=125mW, Min Operating Temperature=-55°C, Power Rating=250mW, Resistance=100R, Resistor Type="Thick Film", Temperature Coefficient=100ppm/°C, Tolerance=1%, Case/Package=0805, Construction=Rectangular, Contact Plating=Tin, Depth=1.25mm, Features="Automotive AEC-Q200", Height=0.026inch, Lead Free="Lead Free", Length=2mm, Military Standard=Not, Mount="Surface Mount", Number of Terminations=2, Packaging="Tape and Reel", Radiation Hardening=No, RoHS Compliant=Yes, Series=RMCF, Size Code=0805, Width=0.049inch
R20 R23 R24 R25 R28 R29: library part CMP-26527-000121-1, "RES 10K OHM 1% 1/8W 0805, RMCF0805FT10K0", Case Code (Imperial)=0805, Case Code (Metric)=2012, Max Operating Temperature=155°C, Max Power Dissipation=125mW, Min Operating Temperature=-55°C, Resistance=10kR, Resistor Type="Thick Film", Temperature Coefficient=100ppm/°C, Tolerance=1%, Case/Package=0805, Construction=Rectangular, Contact Plating=Tin, Depth=1.25mm, Features="Automotive AEC-Q200", Height=0.026inch, Lead Free="Lead Free", Length=2mm, Military Standard=Not, Mount="Surface Mount", Number of Terminations=2, Packaging="Tape and Reel", Power Rating=125mW, Radiation Hardening=No, RoHS Compliant=Yes, Series=RMCF, Size Code=0805, Width=0.049inch
SW1: library part CMP-71745-000011-1, "SWITCH SLIDE DPDT 200MA 12V", Current Rating=200mA, Max Operating Temperature=85°C, Min Operating Temperature=-40°C, Operating Force=153gf, Voltage Rating (DC)=12V, Actuator Length=2mm, Actuator Material=Nylon, Actuator Type=Standard, Contact Material=Copper, Contact Plating=Silver, Contact Style=Non-Shorting, Electrical Life=10000Cycles, Mount="Surface Mount", Packaging="Cut Tape", Series=CL-SB, Switch Function=On-On, Switch Travel=2mm, Throw Configuration=DPDT
SW2 SW3 SW4: library part CMP-03402-000004-1, "SWITCH TACTILE SPST-NO 0.05A 24V", Contact Current Rating=50mA, Contact Resistance=100mΩ, Manufacturer="TE Connectivity", Operating Force=160gf, Temperature="-35°C to +85°C", Temperature Range High=+85°C, Temperature Range Low=-35°C, Voltage Rating Dc=24V, Automotive=No, Category=Switch, ComponentLink2Description=Datasheet, ComponentLink2URL=https://www.te.com/commerce/DocumentDelivery/DDEController?Action=showdoc&DocId=Customer+Drawing%7F1825910%7FC10%7Fpdf%7FEnglish%7FENG_CD_1825910_C10.pdf%7F2-1825910-7, Device Class L1=Electromechanical, Device Class L2=Switches, Device Class L3="Pushbutton Switches", Digikey Description="SWITCH TACTILE SPST-NO 0.05A 24V", Electromechanical Life=100000Cycles, Height=13.3mm, Lead Free=Yes, Manufacturer Part Number=2-1825910-7, Mount="Through Hole", Mouser Description="Switch Tactile OFF (ON) SPST Extended Round Button PC Pins 0.05A 24VDC 100000Cycles 1.57N Thru-Hole Loose", Octopart=https://octopart.com/2-1825910-7-te+connectivity-42270510, Package=2-1825910-7, RoHS=TRUE, Throw Configuration=SPST-NO
U1 U2: library part CMP-1310-00171-1, "Single Supply Quad Operational Amplifier, 3 to 32 V, 0 to 70 degC, 14-Pin SOIC, Pb-Free, Tape and Reel", Manufacturer="On Semiconductor", ComponentLink1Description="Manufacturer URL", ComponentLink1URL=http://www.onsemi.com/, ComponentLink2Description=Datasheet, ComponentLink2URL=http://www.onsemi.cn/pub_link/Collateral/LM324-D.PDF, ComponentLink3Description="Package Specification", ComponentLink3URL=http://www.onsemi.com/pub_link/Collateral/751A-03.PDF, DatasheetVersion="Rev. 25", Mounting Technology="Surface Mount", PackageDescription="14-Pin Small Outline Integrated Circuit, Body 8.65 x 3.9 mm, Pitch 1.27 mm", PackageReference=SOIC-14-751A-03, PackageVersion="Rev. K, 05/2011", Packing="Tape and Reel", PartNumber=LM324DR2G, RoHS=TRUE, VCC Max (V)=32, VCC Min (V)=3
U3: library part CMP-0244-00307-2, "IC REG LINEAR 3.3V 800MA SOT223", Case/Package=SOT-223, Dropout Voltage=1.1V, Input Bias Current=5mA, Max Input Voltage=15V, Max Operating Temperature=125°C, Max Output Current=1.3A, Max Output Voltage=3.3V, Max Power Dissipation=12W, Min Input Voltage=5.3V, Min Operating Temperature=-40°C, Output Current=950mA, Output Voltage Accuracy=1%, Package Quantity=1, Quiescent Current=10mA, Accuracy=1%, Contact Plating=Tin, Height=1.8mm, Lead Free="Lead Free", Length=6.5mm, Max Supply Voltage=15V, Min Output Voltage=3.3V, Min Supply Voltage=3.3V, Mount="Surface Mount", Nominal Output Voltage=3.3V, Number of Outputs=1, Number of Pins=4, Number of Regulators=1, Number of Terminals=4, Output Type=Fixed, Output Voltage=3.3V, Packaging="Tape and Reel", Polarity=Positive, Power Dissipation=12W, Radiation Hardening=No, REACH SVHC="No SVHC", Termination=SMD/SMT, Weight=0.01lb, Width=3.5mm

## Free pads (board coordinates)
  round 3 hole 3: 2(4.572,3.937) 2(4.572,54.737) 2(50.292,3.937) 2(50.292,54.737)

## Via types
v1: diameter 0.6, hole 0.3, Top Layer to Bottom Layer, 14 vias

## Nets (pads, with @x,y where several pads share a name; then routed paths per layer and width w, separated by ;. In a path a pad name is that pad's centre, name@x,y a point inside that pad or via, vN(x,y) a via of type N, cw(c..) or ccw(c..) an arc to the next point about the centre after c; other vN are vias at no path point)
+3V3: C8.1 D1.2 D4.2 D7.2 D8.2 D9.2 J1.5 J7.1 J10.1 P1.1 R2.1 R6.1 SW2.1 SW3.1 SW4.1 U1.11 U2.11 U3.2 U3.4 | length 209.3
  Top Layer w0.254: D7.2 13.683,8.567 SW4.1 ; D1.2 24.828,58.039 ; P1.1 23.69,56.901 24.828,58.039 ; J1.5 26.162,59.372 24.828,58.039 ; SW3.1 28.683,8.567 D9.2 32.385,19.003 32.385,42.52 v1(31.902,43.002) ; J7.1 43.761,19.306 43.683,19.228 D8.2 43.683,8.567 SW2.1
  Bottom Layer w0.254: J10.1 7.807,63.063 9.314,63.063 R2.1 13.335,61.228 ; D7.2 15.502,17.12 26.864,17.12 D9.2 32.407,19.025 34.166,19.025 ; R6.1 13.335,61.228 ; v1(31.902,43.002) 30.48,43.002 29.997,43.485 29.997,45.72 29.578,46.139 24.829,46.139 P1.1 23.69,52.18 21.458,54.412 ; U2.11 39.624,56.337 37.699,54.412 21.458,54.412 ; U3.2 U3.4 33.823,19.367 34.166,19.025 ; D8.2 43.683,15.611 43.335,15.959 43.335,15.974 40.284,19.025 34.166,19.025 ; J7.1 44.88,22.122 C8.1 48.082,22.122 48.721,22.761 D4.2 ; 13.335,61.228 12.827,60.72 13.103,57.576 U1.11 13.103,56.197 14.159,55.141 20.729,55.141 21.458,54.412
GND: B-1.1 C2.2 C4.2 C6.2 C7.2 C8.2 C9.2 D5.2 J1.3 J4.2 J4.3 J6.2 J6.3 J8.1 J11.1 P1.2 Q2.2 Q3.2 Q4.2 Q5.2 R1.2 R5.2 R7.2 R12.1 R13.2 R17.1 R20.2 R23.2 R24.2 R25.2 R28.2 R29.2 U1.4 U2.4 U3.1 | length 372.2
  Top Layer w0.508: J11.1 3.37,39.556 6.676,36.25 J6.3 ; J6.2 4.5,33.25 J6.3 ; v1@6.235,61.228 6.241,61.234 6.241,61.347 7.886,62.992 v1(18.288,62.992) ; v1@6.242,61.228 6.241,61.227 6.241,61.185 6.269,61.157 6.269,61.06 7.739,59.589 ; J1.3 27.432,62.636 27.407,62.662 24.435,62.662 24.003,62.23 24.003,60.008 23.585,59.589 R1.2 7.739,59.589 ; J8.1 37.567,39.014 37.567,44.018 35.357,46.228 27.458,46.228 P1.2 24.791,43.561 22.735,43.561 18.415,47.881 ; J4.3 J4.2 ; J6.3 8.504,36.25 12.364,39.923 12.364,41.83 18.415,47.881 ; 7.739,59.589 18.415,48.914 18.415,47.881
  Bottom Layer w0.508: v1(6.223,61.228) R5.2 ; J6.3 12.852,36.25 14.271,37.668 18.689,37.668 19.66,36.698 Q2.2 20.777,36.698 21.534,35.941 R17.1 22.583,35.549 22.583,34.821 23.114,34.29 C9.2 ; R29.2 15.185,5.55 B-1.1 20.556,5.55 23.241,5.55 ; Q3.2 14.047,11.751 15.85,13.554 ; C2.2 13.377,50.825 13.103,51.1 U1.4 13.103,52.705 13.42,53.023 17.716,53.023 22.225,48.514 22.225,44.056 22.543,43.739 24.969,43.739 P1.2 ; R7.2 17.004,61.228 18.528,62.752 18.694,62.917 18.694,62.992 ; R20.2 15.85,13.554 ; v1(18.288,62.992) 18.694,62.992 ; Q5.2 28.413,13.148 31.674,16.408 35.683,16.408 ; D5.2 31.002,35.724 31.598,35.128 35.849,35.128 ; R28.2 35.683,16.408 ; J8.1 37.188,37.084 R12.1 36.299,35.55 35.877,35.128 35.849,35.128 ; C4.2 U2.4 39.624,52.705 41.91,54.991 44.552,54.991 44.552,60.02 ; C6.2 41.674,60.892 42.545,60.02 44.552,60.02 ; 42.113,29.925 42.113,18.424 44.13,16.407 44.141,16.407 44.789,15.759 44.789,15.748 46.519,14.018 46.519,13.447 R23.2@46.715,13.251 ; R24.2 38.399,5.55 ; 45.352,29.925 R13.2 45.352,25 46.73,23.622 C8.2 ; Q4.2 45.786,11.364 45.932,11.51 45.932,11.56 46.519,12.147 46.519,13.055 R23.2@46.715,13.251 ; R23.2@46.519,13.251 43.899,13.251 42.545,14.605 42.545,15.875 42.012,16.408 38.399,16.408 ; R23.2 R23.2@46.715,13.251 ; J4.3 51.299,30.048 45.352,30.048 42.113,30.048 U3.1 39.367,30.048 36.332,33.083 C7.2 36.332,34.646 35.849,35.128 ; 15.85,13.554 15.85,16.307 21.793,16.358 23.241,14.91 23.241,5.55 ; 18.694,62.992 43.878,62.992 44.552,62.319 44.552,60.02 ; 23.241,5.55 R25.2 38.399,5.55 ; 35.683,16.408 38.399,16.408 ; 38.399,5.55 38.399,16.408
NetB+1_1: B+1.1 Q1.3 R14.1 SW1.2 | length 45.5
  Bottom Layer w0.203: B+1.1 0.533,9.967 0.533,18.933 SW1.2 1.8,20 3.009,21.209 4.868,21.209 10.295,26.636 Q1.3 22.225,27.14 21.907,27.457 19.05,27.457 18.669,27.838 R14.1
NetC1_1: C1.1 R3.2 R4.1 | length 11.8
  Bottom Layer w0.203: C1.1 14.845,47.509 15.088,47.752 17.554,47.752 R4.1 18.443,47.904 18.448,47.91 R3.2
NetC1_2: C1.2 J2.1 J11.13 U1.6 U1.7 | length 43.5
  Bottom Layer w0.203: U1.6 U1.7 9.293,50.643 9.272,50.622 C1.2 8.084,49.359 J2.1 6.223,43.942 18.339,43.942 20.117,42.164 20.117,40.322 20.46,39.98 32.83,39.98 J11.13
NetC2_1: C2.1 R4.2 U1.5 | length 17.2
  Bottom Layer w0.203: U1.5 11.833,50.597 11.527,50.292 C2.1 11.527,48.273 8.344,48.273 8.306,48.235 8.306,46.787 8.331,46.761 16.891,46.761 R4.2
NetC3_1: C3.1 R8.2 R9.1 | length 8.8
  Bottom Layer w0.203: C3.1 41.184,44.729 43.091,44.729 43.829,45.467 R9.1 43.829,48.26 44.196,48.627 R8.2
NetC3_2: C3.2 J3.1 J11.14 U2.6 U2.7 | length 21.3
  Bottom Layer w0.203: J3.1 34.952,48.984 37.084,46.852 ; U2.7 U2.6 37.084,46.852 ; J11.14 36.39,44.518 36.83,44.958 38.978,44.958 ; C3.2 39.334,44.602 38.978,44.958 ; 37.084,46.852 38.978,44.958
NetC4_1: C4.1 R9.2 U2.5 | length 8
  Bottom Layer w0.203: U2.5 38.354,47.477 38.913,46.918 C4.1 40.919,46.918 40.974,46.863 R9.2
NetC5_1: C5.1 R10.2 R11.1 | length 12.5
  Bottom Layer w0.203: R10.2 34.149,60.514 R11.1 34.149,61.747 34.882,62.48 41.863,62.48 C5.1
NetC5_2: C5.2 J4.1 J11.16 U2.13 U2.14 | length 48
  Top Layer w0.203: J11.16 44.02,38.45 J4.1
  Bottom Layer w0.203: J11.16 40.281,42.189 37.782,42.189 37.404,41.811 37.404,40.322 37.061,39.98 35.56,39.98 35.242,40.297 35.242,43.066 30.937,47.371 30.937,52.07 31.255,52.387 37.681,52.387 41.072,55.778 42.164,55.804 U2.13 U2.14 C5.2
NetC6_1: C6.1 R11.2 U2.12 | length 8.6
  Bottom Layer w0.203: R11.2 38.254,59.042 C6.1 40.786,57.867 40.894,57.76 U2.12
NetC7_1: C7.1 D3.2 D5.1 F1.2 U3.3 | length 23.7
  Bottom Layer w0.203: D5.1 28.053,35.724 30.554,33.223 F1.2 31.598,33.02 31.697,32.921 D3.2 33.68,32.921 33.905,33.146 C7.1 34.832,29.316 35.242,28.905 41.224,28.905 41.25,28.88 41.25,25.474 41.224,25.448 U3.3
NetC9_1: C9.1 J11.15 R15.2 R17.2 | length 26.1
  Bottom Layer w0.203: R15.2 21.261,33.188 21.609,32.84 21.609,32.64 22.423,31.826 24.589,31.826 24.614,31.852 C9.1 24.614,34.112 24.141,34.585 R17.2 24.141,37.148 24.459,37.465 35.395,37.465 J11.15
NetD1_1: D1.1 R1.1 | length 2.4
  Top Layer w0.203: D1.1 21.107,61.539 21.305,61.341 R1.1
NetD2_1: D2.1 D6.1 F1.1 | length 7.6
  Bottom Layer w0.203: D2.1 25.52,29.557 D6.1 25.554,30.505 27.104,32.056 F1.1
NetD2_2: D2.2 J5.1 SW1.1 | length 32.4
  Bottom Layer w0.203: SW1.1 1.8,17.5 2.969,18.669 19.495,18.669 26.924,26.098 D2.2 28.905,26.098 29.222,25.781 J5.1
NetD3_1: D3.1 R12.2 | length 2.1
  Bottom Layer w0.203: D3.1 33.63,36.421 33.856,36.195 R12.2
NetD4_1: D4.1 R13.1 | length 2.8
  Bottom Layer w0.203: R13.1 47.176,26.261 D4.1
NetD6_2: D6.2 J9.1 SW1.4 | length 39
  Bottom Layer w0.203: SW1.4 4.597,17.5 5.106,18.009 25.883,18.009 31.852,23.978 31.852,28.277 J9.1 27.918,29.655 D6.2
NetD7_1: D7.1 R18.1 | length 5.5
  Bottom Layer w0.203: R18.1 8.783,12.941 D7.1
NetD8_1: D8.1 R21.1 | length 2.8
  Bottom Layer w0.203: R21.1 40.663,13.741 41.143,14.221 D8.1
NetD9_1: D9.1 R26.1 | length 2.8
  Bottom Layer w0.203: R26.1 25.663,13.741 26.143,14.221 D9.1
NetJ6_1: J6.1 SW1.5 | length 15.7
  Top Layer w0.203: v1(10.5,23.352) J6.1
  Bottom Layer w0.203: SW1.5 7.148,20 v1(10.5,23.352)
NetJ10_3: J10.3 P1.3 | length 48.1
  Top Layer w0.203: J10.3 7.319,68.631 5.245,68.631 4.877,68.263 4.877,59.512 13.081,51.308 v1(13.081,44.806)
  Bottom Layer w0.203: v1(13.081,44.806) 18.517,44.806 20.091,43.231 27.001,43.231 P1.3
NetJ10_6: J10.6 P1.4 | length 37.5
  Top Layer w0.203: J10.6 17.784,65.786 27.826,65.786 32.893,60.719 v1(32.893,53.721)
  Bottom Layer w0.203: P1.4 30.582,45.728 30.582,52.984 31.318,53.721 v1(32.893,53.721)
NetJ10_13: J10.13 R16.1 | length 80.7
  Bottom Layer w0.203: R16.1 13.22,33.161 12.675,33.706 5.639,33.706 0.762,38.583 0.762,68.41 0.881,68.529 32.821,68.529 J10.13
NetJ11_6: J11.6 R19.1 R20.1 | length 32
  Top Layer w0.203: J11.6 19.177,37.893 v1(19.177,15.311)
  Bottom Layer w0.203: R20.1 v1(19.177,15.311) 19.868,15.311 R19.1
NetJ11_8: J11.8 R27.1 R28.1 | length 54.2
  Top Layer w0.203: J11.8 22.519,39.631 26.817,39.631 27.508,40.322 27.508,43.256 27.94,43.688 32.385,43.688 32.766,43.307 32.766,14.605 ; v1(30.937,13.649) 31.893,14.605 32.766,14.605 ; v1(33.655,12.065) 33.655,13.716 32.766,14.605
  Bottom Layer w0.203: v1(30.937,13.649) 30.937,13.962 32.213,15.238 R28.1 ; v1(33.655,12.065) 33.731,12.141 34.223,12.141 35.359,13.277 R27.1
NetJ11_9: J11.9 R29.1 SW4.4 | length 56.7
  Top Layer w0.203: SW4.4 12.548,3.298 12.548,32.563 15.037,35.052 15.037,41.91 15.496,42.369 22.321,42.369 J11.9
  Bottom Layer w0.203: SW4.4 10.25,2.905 10.795,3.45 R29.1
NetJ11_10: J11.10 R25.1 SW3.4 | length 54.5
  Top Layer w0.203: SW3.4 20.117,6.133 20.117,41.988 20.142,42.014 22.116,42.014 22.676,41.453 22.676,40.322 23.013,39.986 25.216,39.986 J11.10
  Bottom Layer w0.203: SW3.4 27.5,3.25 R25.1
NetJ11_11: J11.11 R22.1 R23.1 | length 42.7
  Top Layer w0.203: v1(34.798,38.862) 34.798,27.965 v1(43.028,19.736)
  Bottom Layer w0.203: J11.11 29.807,42.037 34.43,42.037 34.874,41.593 34.874,38.938 v1(34.798,38.862) ; v1(43.028,19.736) 46.914,15.85 R23.1 R22.1
NetJ11_12: J11.12 R24.1 SW2.4 | length 55.7
  Top Layer w0.203: J11.12 27.711,37.401 27.711,5.791 32.503,1 SW2.4
  Bottom Layer w0.203: SW2.4 40.25,3.06 40.64,3.45 R24.1
NetQ1_1: Q1.1 Q2.3 R14.2 | length 7.3
  Bottom Layer w0.203: Q2.3 19.177,33.669 R14.2 19.939,31.891 19.939,30.122 21.275,28.786 Q1.1
NetQ1_2: Q1.2 R15.1 | length 3.3
  Bottom Layer w0.203: R15.1 21.11,31.088 23.175,29.023 Q1.2
NetQ2_1: Q2.1 R16.2 | length 6.4
  Bottom Layer w0.203: R16.2 15.972,31.609 17.272,32.909 17.272,36.195 17.775,36.698 Q2.1
NetQ3_1: Q3.1 R19.2 | length 7.3
  Bottom Layer w0.203: Q3.1 16.684,9.851 18.158,11.325 R19.2
NetQ3_3: Q3.3 R18.2 | length 8.8
  Bottom Layer w0.203: R18.2 9.969,11.189 10.357,10.801 Q3.3
NetQ4_1: Q4.1 R22.2 | length 9.1
  Bottom Layer w0.203: Q4.1 50.358,9.464 51.562,10.668 R22.2
NetQ4_3: Q4.3 R21.2 | length 7.3
  Bottom Layer w0.203: R21.2 43.078,10.925 43.59,10.414 Q4.3
NetQ5_1: Q5.1 R27.2 | length 7.6
  Bottom Layer w0.203: Q5.1 32.025,9.851 33.499,11.325 R27.2
NetQ5_3: Q5.3 R26.2 | length 4.8
  Bottom Layer w0.203: R26.2 27.965,10.925 28.09,10.801 Q5.3
NetR2_2: R2.2 R5.1 U1.10 | length 5.7
  Bottom Layer w0.203: R5.1 R2.2 11.303,59.676 11.303,58.105 11.833,57.576 U1.10
NetR3_1: R3.1 U1.1 U1.2 | length 4.2
  Bottom Layer w0.203: U1.2 U1.1 16.913,50.461 16.896,50.444 R3.1
NetR6_2: R6.2 R7.1 U1.12 | length 5.5
  Bottom Layer w0.203: U1.12 14.373,58.268 13.97,58.67 R6.2 13.97,59.69 16.725,59.69 16.739,59.676 R7.1
NetR8_1: R8.1 U2.1 U2.2 | length 4.3
  Bottom Layer w0.203: U2.2 U2.1 44.57,50.179 R8.1
NetR10_1: R10.1 U2.8 U2.9 | length 4.1
  Bottom Layer w0.203: R10.1 35.712,58.065 35.814,57.963 U2.8 U2.9
NetU1_8: U1.8 U1.9 | length 1.3
  Bottom Layer w0.203: U1.8 U1.9
NetU1_13: U1.13 U1.14 | length 1.3
  Bottom Layer w0.203: U1.13 U1.14
STpin: J1.1 J10.2 | length 26.8
  Top Layer w0.203: J10.2 8.132,65.278 26.797,65.278 28.702,63.373 J1.1
X: J1.2 U1.3 | length 50.3
  Top Layer w0.203: v1@15.407,49.966 5.537,59.835 5.537,64.453 5.855,64.77 26.022,64.77 28.067,62.725 28.067,59.715 28.702,59.08 J1.2
  Bottom Layer w0.203: U1.3 14.373,51 v1(15.401,49.971)
Y: J1.4 U2.3 | length 31.5
  Top Layer w0.203: J1.4 27.432,55.499 30.099,52.832 v1(47.879,52.832)
  Bottom Layer w0.203: U2.3 40.894,52.451 41.275,52.832 v1(47.879,52.832)
Z: J1.6 U2.10 | length 15.6
  Top Layer w0.203: v1(26.162,54.991) J1.6
  Bottom Layer w0.203: v1(26.162,54.991) 37.719,54.991 38.354,55.626 U2.10
pads on no net: Designator1.1 Designator1.2 J10.4 J10.5 J10.7 J10.8 J10.9 J10.10 J10.11 J10.12 J10.14 J10.15 J10.16 J10.17 J10.18 J10.19 J10.20 J11.2 J11.3 J11.4 J11.5 J11.7 J11.17 J11.18 J11.19 J11.20 SW1.3 SW1.6 SW2.2 SW2.3 SW3.2 SW3.3 SW4.2 SW4.3

## Silkscreen, mask and mechanical layers (free items; w line width, h text height)
Top Overlay:
  drawing of 385 lines, arcs and shapes, not listed

## Dimensions
4.572,54.737 to 0,70 on Mechanical 1
50.292,54.737 to 55,70 on Mechanical 1
50.292,54.737 to 4.572,54.737 on Bottom Layer